# EAGLE board atmosphere2n (EAGLE 7.5.0)
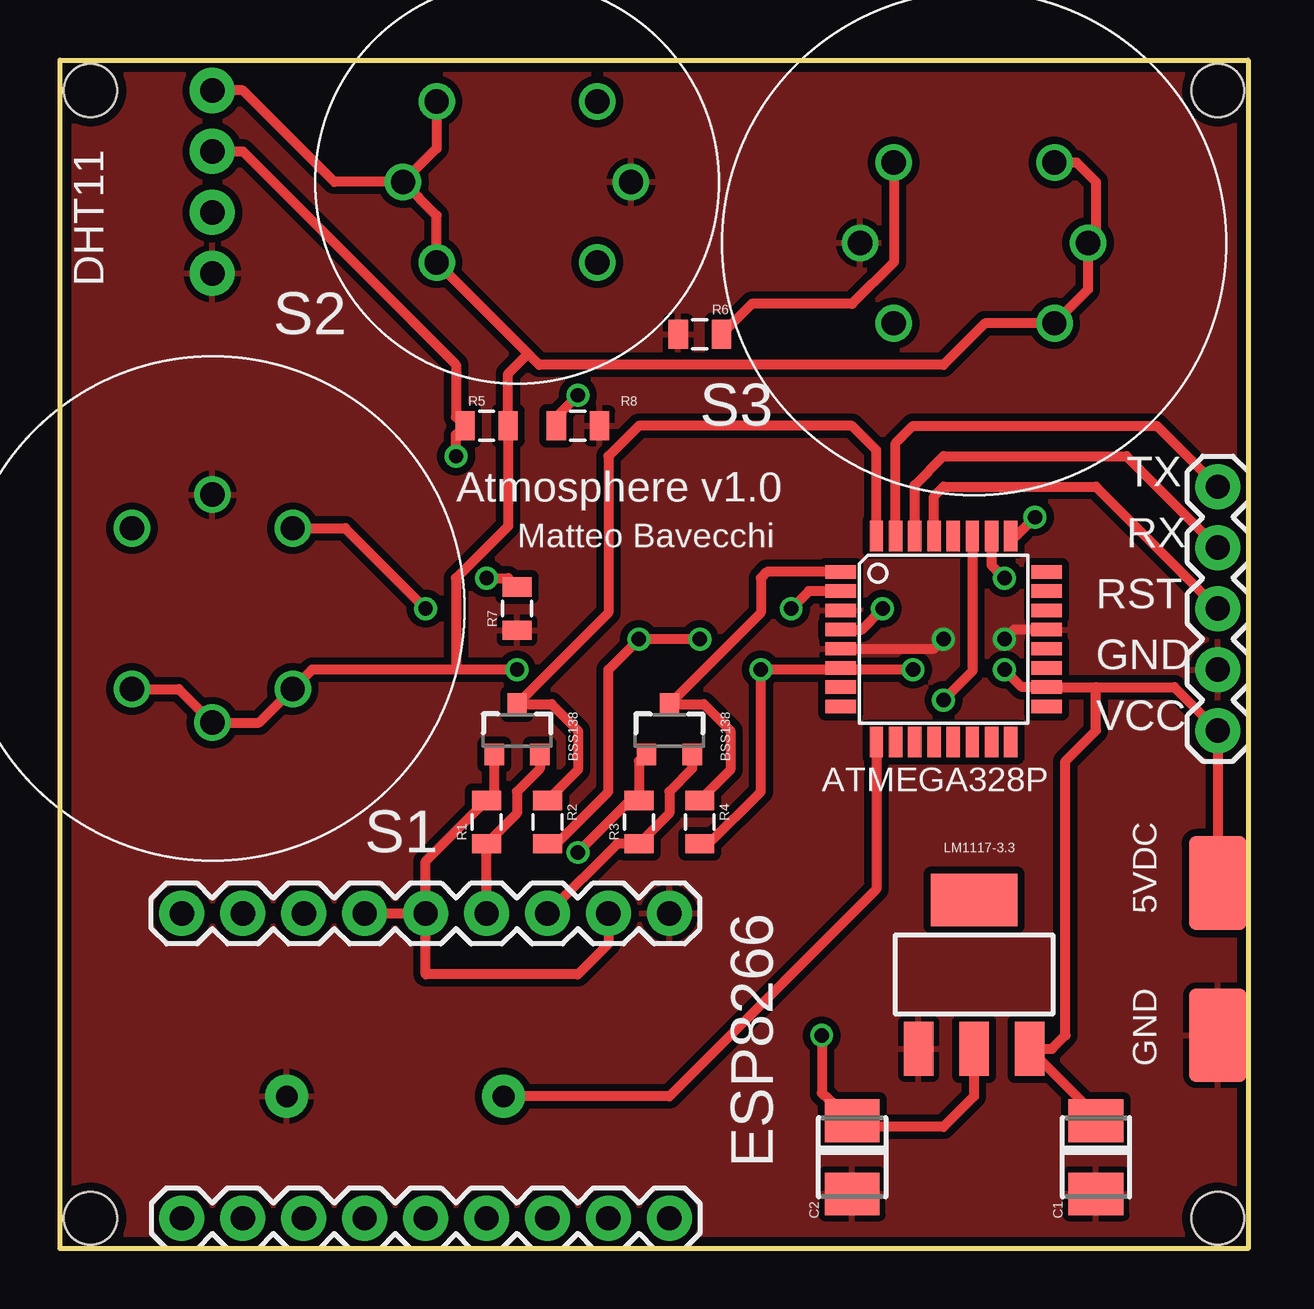
[diagram p0: board, top side]
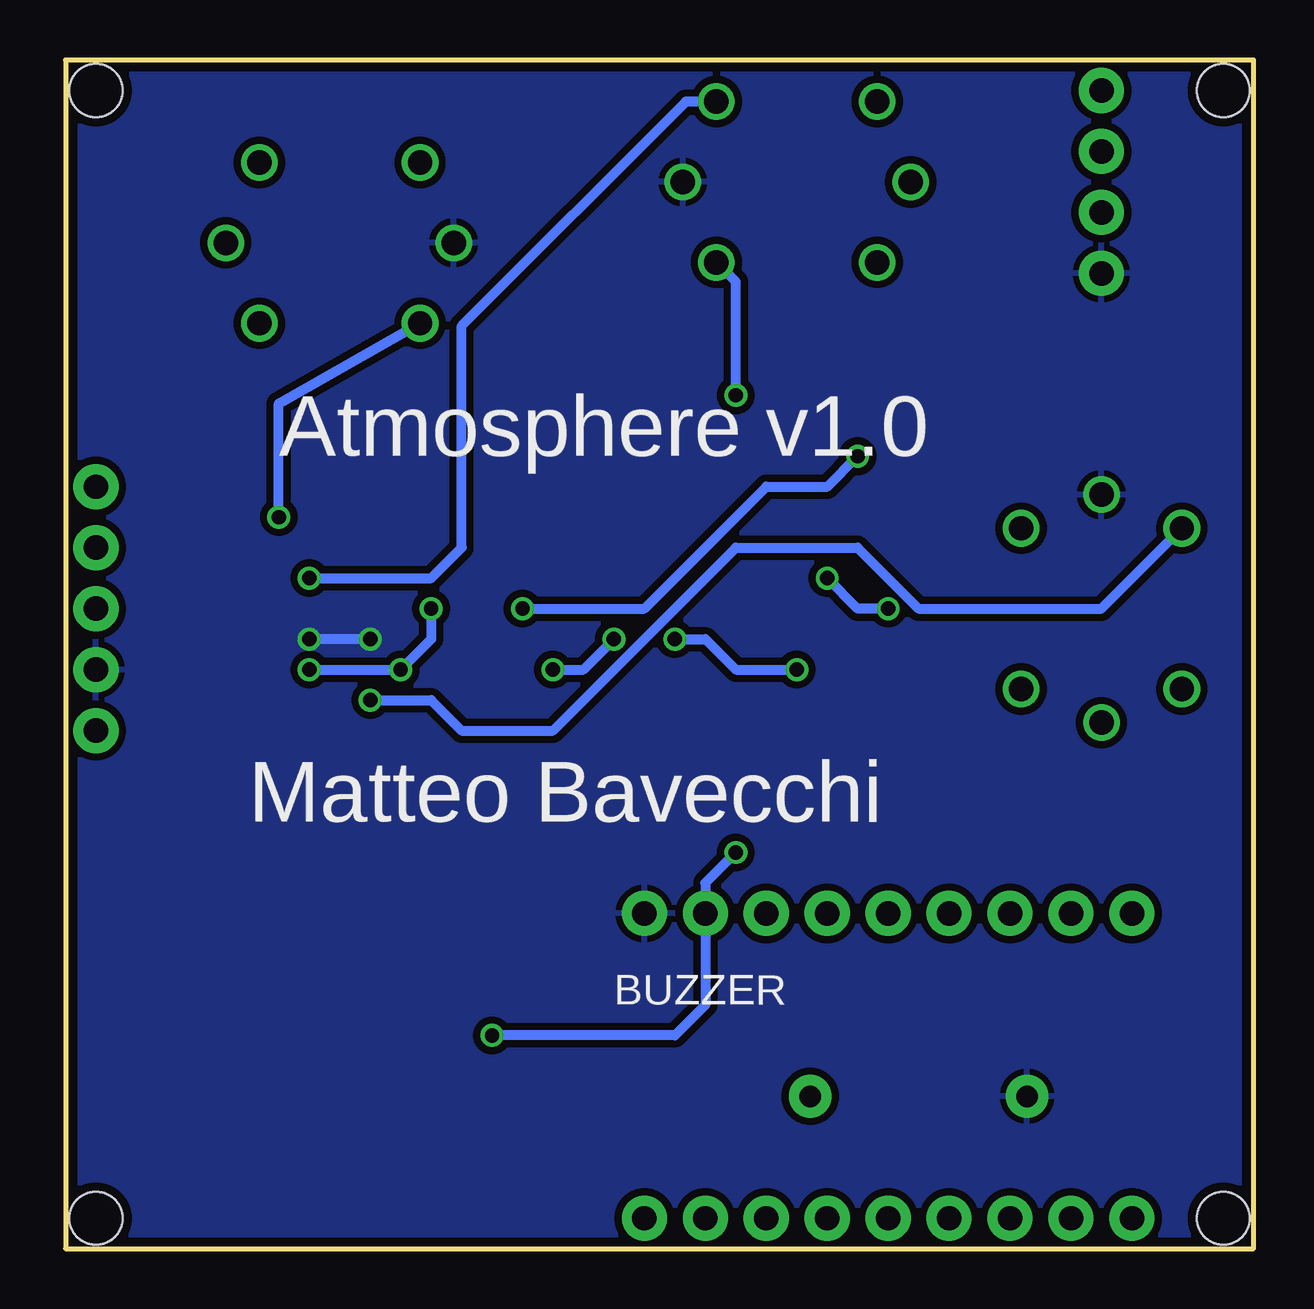
[diagram p1: board, bottom side, seen from below]

Size 49.53 x 49.53 mm. Coordinates in mm from the lower left corner, seen from the top.
Outline: 49.53,0 0,0 0,49.53 49.53,49.53 49.53,0
Copper layers (1*16): Top 0.0356mm / dielectric 1.5011mm / Bottom 0.0356mm
Design rules "LaenPCBOrder": minimum track width 6mil, minimum drill 13mil, track to track 6mil, track to pad 6mil, pad to pad 6mil, via to via 6mil, smd to smd 6mil, copper to edge 15mil, drill to drill 6mil, minimum pad ring 7mil, minimum via ring 7mil, stop-mask expansion 3mil, vias tented up to drill 0mil, thermal gap 10mil
Holes 2.2 mm at 1.27,48.26 48.26,48.26 48.26,1.27 1.27,1.27

## Footprints (pad centres in the part's own frame; a part is rotated, then mirrored left to right if it is on the bottom)
LUXEON-PAD = smd 3.9 x 2.4: P$1 0,0
TQFP32-08 = smd 1.27 x 0.559: 1 -4.293,2.8; 2 -4.293,2; 3 -4.293,1.2; 4 -4.293,0.4; 5 -4.293,-0.4; 6 -4.293,-1.2; 7 -4.293,-2; 8 -4.293,-2.8; 17 4.293,-2.8; 18 4.293,-2; 19 4.293,-1.2; 20 4.293,-0.4; 21 4.293,0.4; 22 4.293,1.2; 23 4.293,2; 24 4.293,2.8 | smd 0.559 x 1.27: 9 -2.8,-4.293; 10 -2,-4.293; 11 -1.2,-4.293; 12 -0.4,-4.293; 13 0.4,-4.293; 14 1.2,-4.293; 15 2,-4.293; 16 2.8,-4.293; 25 2.8,4.293; 26 2,4.293; 27 1.2,4.293; 28 0.4,4.293; 29 -0.4,4.293; 30 -1.2,4.293; 31 -2,4.293; 32 -2.8,4.293
SOT23-3 = smd 0.8 x 0.9: 1 -0.95,-1; 2 0.95,-1; 3 0,1.1
BUZZER-12MM = drill 0.9 pad 1.778: + 4.52,0; - -4.52,0
C3528-21/T = smd 1.778 x 2.286: + 1.524,0; - -1.524,0
1X04_NO_SILK_ALL_ROUND = drill 1.016 pad 1.88: 1 0,0; 2 2.54,0; 3 5.08,0; 4 7.62,0
1X09 = drill 1.016 pad 1.88: 1 0,0; 2 2.54,0; 3 5.08,0; 4 7.62,0; 5 10.16,0; 6 12.7,0; 7 15.24,0; 8 17.78,0; 9 20.32,0
1X05 = drill 1.016 pad 1.88: 1 0,0; 2 2.54,0; 3 5.08,0; 4 7.62,0; 5 10.16,0
MQ-3 = drill 1.016: A1 -3.35,3.35; A2 -3.35,-3.35; B1 3.35,3.35; B2 3.35,-3.35; HA -4.75,0; HB 4.75,0
0805 = smd 0.8 x 1.2: 1 -0.9,0; 2 0.9,0
SOT223 = smd 1.219 x 2.235: 1 -2.311,-3.099; 2 0,-3.099; 3 2.311,-3.099 | smd 3.6 x 2.2: 4 0,3.099

## Placement (x,y rotation side)
+  [LUXEON-PAD]  48.26,15.24 90 top
-  [LUXEON-PAD]  48.26,8.89 90 top
ATMEGA328P-AU  ATMEGA328  [TQFP32-08]  36.83,25.4 0 top
BSS138  [SOT23-3]  19.05,21.59 0 top
BSS138-2  [SOT23-3]  25.4,21.59 0 top
BUZZER  BUZZERPTH  [BUZZER-12MM]  13.97,6.35 0 top
C1  10uF  [C3528-21/T]  43.18,3.81 90 top
C2  10uF  [C3528-21/T]  33.02,3.81 90 top
DHT11  [1X04_NO_SILK_ALL_ROUND]  6.35,48.26 270 top
ESP-ADC1  [1X09]  25.4,13.97 180 top
ESP-ADC2  [1X09]  5.08,1.27 0 top
FRAME1  FRAME-LETTER  [CREATIVE_COMMONS]  5.08,-8.89 0 top  (outside the outline)
J1  [1X05]  48.26,21.59 90 top
MQ-2  METHANE_SENSOR  [MQ-3]  19.05,44.45 0 top
MQ-135  METHANE_SENSOR  [MQ-3]  6.35,26.67 90 top
R1  [0805]  17.78,17.78 90 top
R2  [0805]  20.32,17.78 270 top
R3  [0805]  24.13,17.78 90 top
R4  [0805]  26.67,17.78 270 top
R5  [0805]  17.78,34.29 0 top
R6  [0805]  26.67,38.1 0 top
R7  [0805]  19.05,26.67 90 top
R8  [0805]  21.59,34.29 0 top
U1  [SOT223]  38.1,11.43 0 top
U$1  METHANE_SENSOR  [MQ-3]  38.1,41.91 180 top

## Library data of the parts
+ - ESP-ADC1 ESP-ADC2 J1 = SparkFun-Connectors
ATMEGA328P-AU = thecustomgeek
BSS138 BSS138-2 = SparkFun-DiscreteSemi; PROD_ID: TRANS-00830
BUZZER = SparkFun-Electromechanical
C1 C2 = rc-master-smd
DHT11 = SparkFun-Connectors; PROD_ID: CONN-09696
FRAME1 = SparkFun-Retired
MQ-2 = SparkFun-Sensors2
MQ-135 U$1 = SparkFun-Sensors
R1-R8 = SparkFun-Passives
U1 = SparkFun-PowerIC; PROD_ID: VREG-08170

## Nets
3.3V: BSS138-2.1 BSS138.1 C2.+ ESP-ADC1.2 ESP-ADC1.5 ESP-ADC1.6 R1.2 R3.2 U1.2
5V: +.P$1 ATMEGA328P-AU.4 ATMEGA328P-AU.6 ATMEGA328P-AU.18 C1.+ DHT11.1 J1.1 MQ-2.A1 MQ-2.A2 MQ-2.HA MQ-135.A1 MQ-135.A2 MQ-135.HA R2.2 R4.2 R5.2 U1.3 U$1.A1 U$1.A2 U$1.HA
DHT-11: ATMEGA328P-AU.2 DHT11.2 R5.1
ESP_3.3_RX: BSS138-2.2 ESP-ADC1.3 R3.1
ESP_3.3_TX: BSS138.2 ESP-ADC1.4 R1.1
ESP_RX: ATMEGA328P-AU.32 BSS138.3 R2.1
ESP_TX: ATMEGA328P-AU.1 BSS138-2.3 R4.1
GND: -.P$1 ATMEGA328P-AU.3 ATMEGA328P-AU.5 ATMEGA328P-AU.21 BUZZER.- C1.- C2.- DHT11.4 ESP-ADC1.1 J1.2 MQ-2.HB MQ-135.HB R6.1 R7.1 R8.2 U1.1 U$1.HB
MQ-2: ATMEGA328P-AU.26 MQ-2.B1
MQ-7: ATMEGA328P-AU.25 U$1.B1
MQ-135: ATMEGA328P-AU.27 MQ-135.B1
N$2: ATMEGA328P-AU.9 BUZZER.+
N$3: MQ-2.B2 R8.1
N$4: MQ-135.B2 R7.2
N$6: R6.2 U$1.B2
RST: ATMEGA328P-AU.29 J1.3
RX: ATMEGA328P-AU.30 J1.4
TX: ATMEGA328P-AU.31 J1.5

## Tracks (layer width: path | path; a pad name or v marks a point on that pad's centre or on a via)
3.3V  (via drill 0.6)
  Top 0.406: BSS138.1 18.1,19 R1.2 15.24,16.14 ESP-ADC1.5 | ESP-ADC1.6 ESP-ADC1.5 | BSS138-2.1 24.4,20.59 24.13,20.32 R3.2 23.76,18.68 v21.59,16.51 | U1.2 38.1,6.35 36.83,5.08 33.15,5.08 C2.+ 31.75,6.48 v31.75,8.89 | ESP-ADC1.2 22.86,12.7 21.59,11.43 15.24,11.43 ESP-ADC1.5
  Bottom 0.406: v31.75,8.89 24.13,8.89 22.86,10.16 ESP-ADC1.2 22.86,15.24 v21.59,16.51
5V  (via drill 0.6)
  Top 0.406: 43.18,23.4 ATMEGA328P-AU.18 40.1,23.4 v39.37,24.13 | 43.18,23.4 46.45,23.4 J1.1 +.P$1 | v35.56,24.13 32.61,24.13 | 32.61,24.13 ATMEGA328P-AU.6 | ATMEGA328P-AU.4 33.42,25.8 v34.29,26.67 | v26.67,25.4 v24.13,25.4 22.86,24.13 22.86,19.05 20.69,16.88 R2.2 | R4.2 27.04,16.88 29.21,19.05 v29.21,24.13 32.61,24.13 | C1.+ 43.18,5.56 U1.3 41.35,8.33 41.91,8.89 41.91,20.32 43.18,21.59 43.18,23.4 | U$1.A2 42.37,45.26 43.18,44.45 43.18,42.24 U$1.HA 42.85,39.96 U$1.A1 38.56,38.56 36.83,36.83 19.97,36.83 19.51,37.29 | 19.51,37.29 MQ-2.A2 15.7,43.05 MQ-2.HA | MQ-2.A1 15.7,45.85 MQ-2.HA | MQ-2.HA 11.43,44.45 7.62,48.26 DHT11.1 | 19.51,37.29 18.68,36.46 R5.2 18.68,30.11 16.51,27.94 16.51,24.13 | MQ-135.A1 4.95,23.32 MQ-135.HA 8.3,21.92 MQ-135.A2 10.51,24.13 16.51,24.13 | v19.05,24.13 16.51,24.13
  Bottom 0.406: v39.37,24.13 v35.56,24.13 34.29,25.4 v34.29,26.67 | v24.13,25.4 22.86,25.4 21.59,24.13 v19.05,24.13 | v29.21,24.13 27.94,24.13 v26.67,25.4
DHT-11  (via drill 0.6)
  Top 0.406: DHT11.2 7.62,45.72 16.51,36.83 16.51,34.66 R5.1 16.51,33.92 v16.51,33.02 | ATMEGA328P-AU.2 31.21,27.4 v30.48,26.67
  Bottom 0.406: v30.48,26.67 25.4,26.67 20.32,31.75 17.78,31.75 v16.51,33.02
ESP_3.3_RX
  Top 0.406: BSS138-2.2 26.35,20 25.4,19.05 25.4,18.15 R3.1 23.23,16.88 ESP-ADC1.3
ESP_3.3_TX
  Top 0.406: BSS138.2 20,20 19.05,19.05 19.05,18.15 R1.1 ESP-ADC1.4
ESP_RX
  Top 0.406: ATMEGA328P-AU.32 34.03,33.28 33.02,34.29 24.13,34.29 22.86,33.02 22.86,26.5 BSS138.3 20.49,22.69 21.59,21.59 21.59,19.95 R2.1
ESP_TX
  Top 0.406: R4.1 27.94,19.95 27.94,21.59 26.84,22.69 BSS138-2.3 29.21,26.5 29.21,27.94 29.47,28.2 ATMEGA328P-AU.1
GND  (via drill 0.6)
  Top 0.406: ATMEGA328P-AU.5 36.43,25 v36.83,25.4 | ATMEGA328P-AU.21 39.77,25.8 v39.37,25.4
  Bottom 0.406: v36.83,25.4 v39.37,25.4
  pour Top (isolate 0.305): 0,0 0,49.53 49.53,49.53 49.53,0
  pour Bottom (isolate 0.305): 0,0 0,49.53 49.53,49.53 49.53,0
MQ-2  (via drill 0.6)
  Top 0.406: ATMEGA328P-AU.26 38.83,28.48 v39.37,27.94
  Bottom 0.406: v39.37,27.94 34.29,27.94 33.02,29.21 33.02,38.45 23.67,47.8 MQ-2.B1
MQ-7  (via drill 0.6)
  Top 0.406: ATMEGA328P-AU.25 39.85,29.69 v40.64,30.48
  Bottom 0.406: v40.64,30.48 40.64,35.21 U$1.B1
MQ-135  (via drill 0.6)
  Top 0.406: ATMEGA328P-AU.27 38.03,24.06 v36.83,22.86
  Bottom 0.406: v36.83,22.86 34.29,22.86 33.02,21.59 29.21,21.59 21.59,29.21 16.51,29.21 13.97,26.67 6.35,26.67 MQ-135.B1
N$2
  Top 0.406: ATMEGA328P-AU.9 34.03,14.98 25.4,6.35 BUZZER.+
N$3  (via drill 0.6)
  Top 0.406: R8.1 20.69,34.66 v21.59,35.56
  Bottom 0.406: v21.59,35.56 21.59,40.29 MQ-2.B2
N$4  (via drill 0.6)
  Top 0.406: MQ-135.B2 11.89,30.02 v15.24,26.67 | v17.78,27.94 18.68,27.94 R7.2
  Bottom 0.406: v15.24,26.67 16.51,26.67 v17.78,27.94
N$6
  Top 0.406: U$1.B2 34.75,41.1 33.02,39.37 28.84,39.37 R6.2
RST
  Top 0.406: ATMEGA328P-AU.29 36.43,31.35 36.83,31.75 43.18,31.75 J1.3
RX
  Top 0.406: ATMEGA328P-AU.30 35.63,31.82 36.83,33.02 44.45,33.02 J1.4
TX
  Top 0.406: ATMEGA328P-AU.31 34.83,33.56 35.56,34.29 45.72,34.29 J1.5

## Text on the board
tPlace: S2 | S3 | TX | Atmosphere v1.0 | Matteo Bavecchi | RX | RST | GND | VCC | BSS138 | BSS138 | ATMEGA328P | S1 | LM1117-3.3 | ESP8266 | 5VDC | GND
bPlace: Atmosphere v1.0 | Matteo Bavecchi | BUZZER